# EAGLE board LSU 4.9 OpenAFR Gauge (EAGLE 9.6.2)
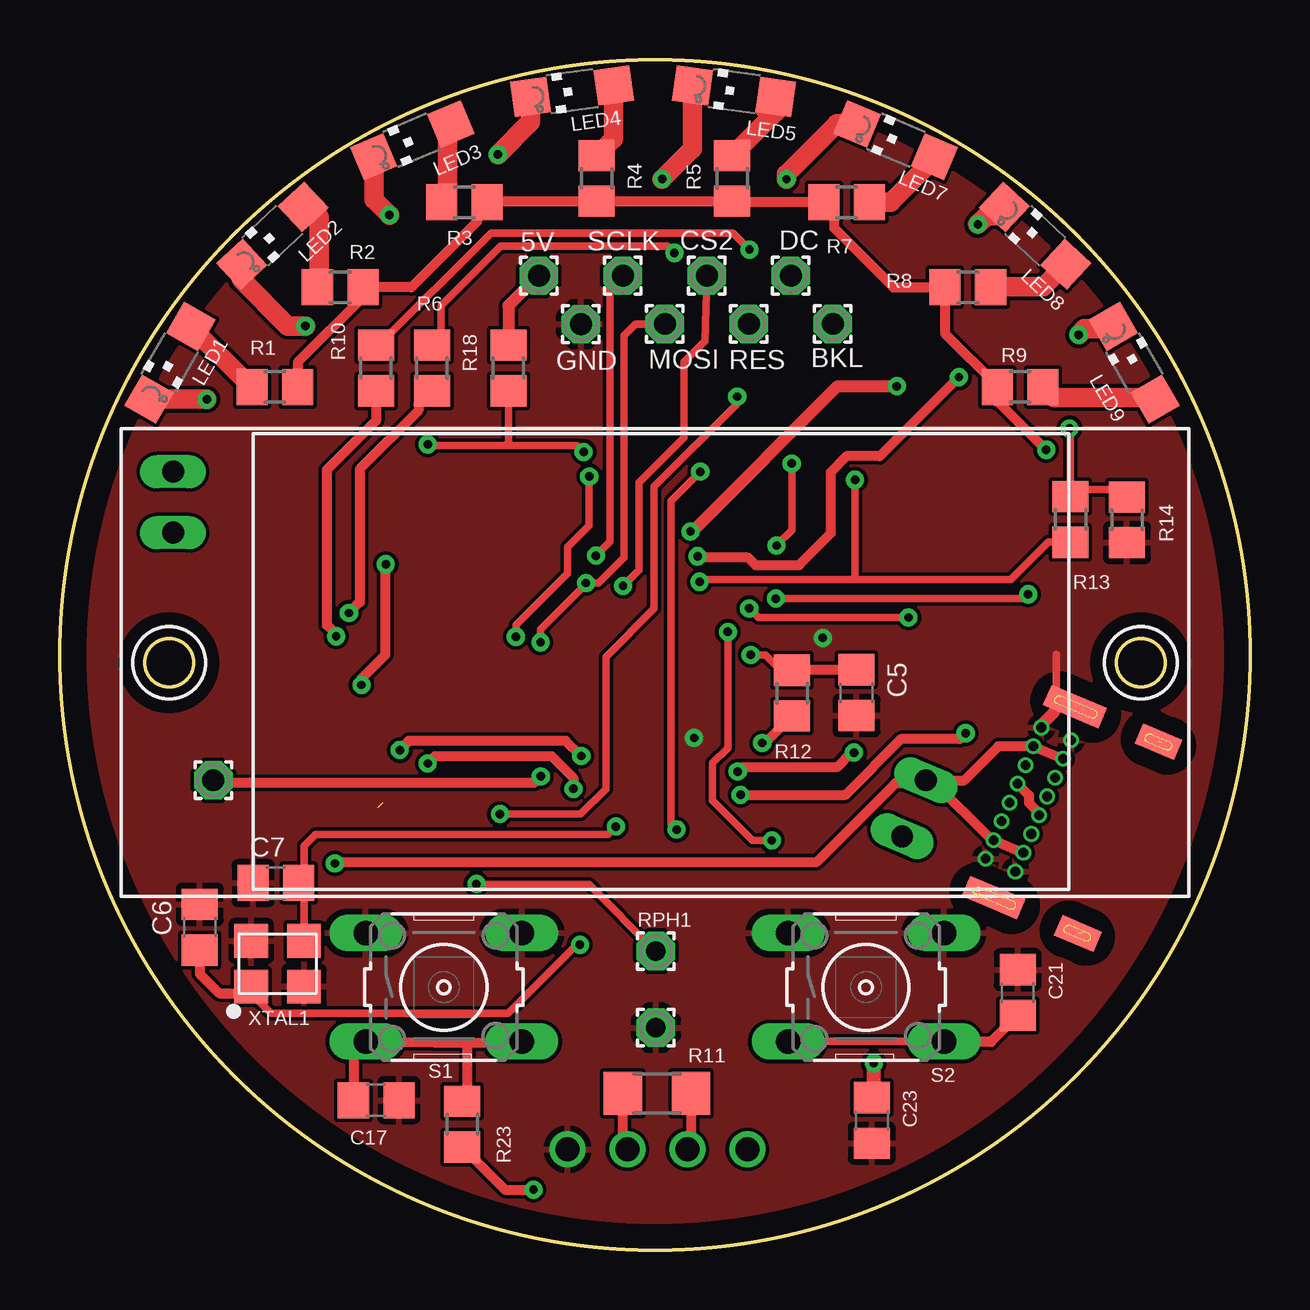
[diagram p0: board, top side]
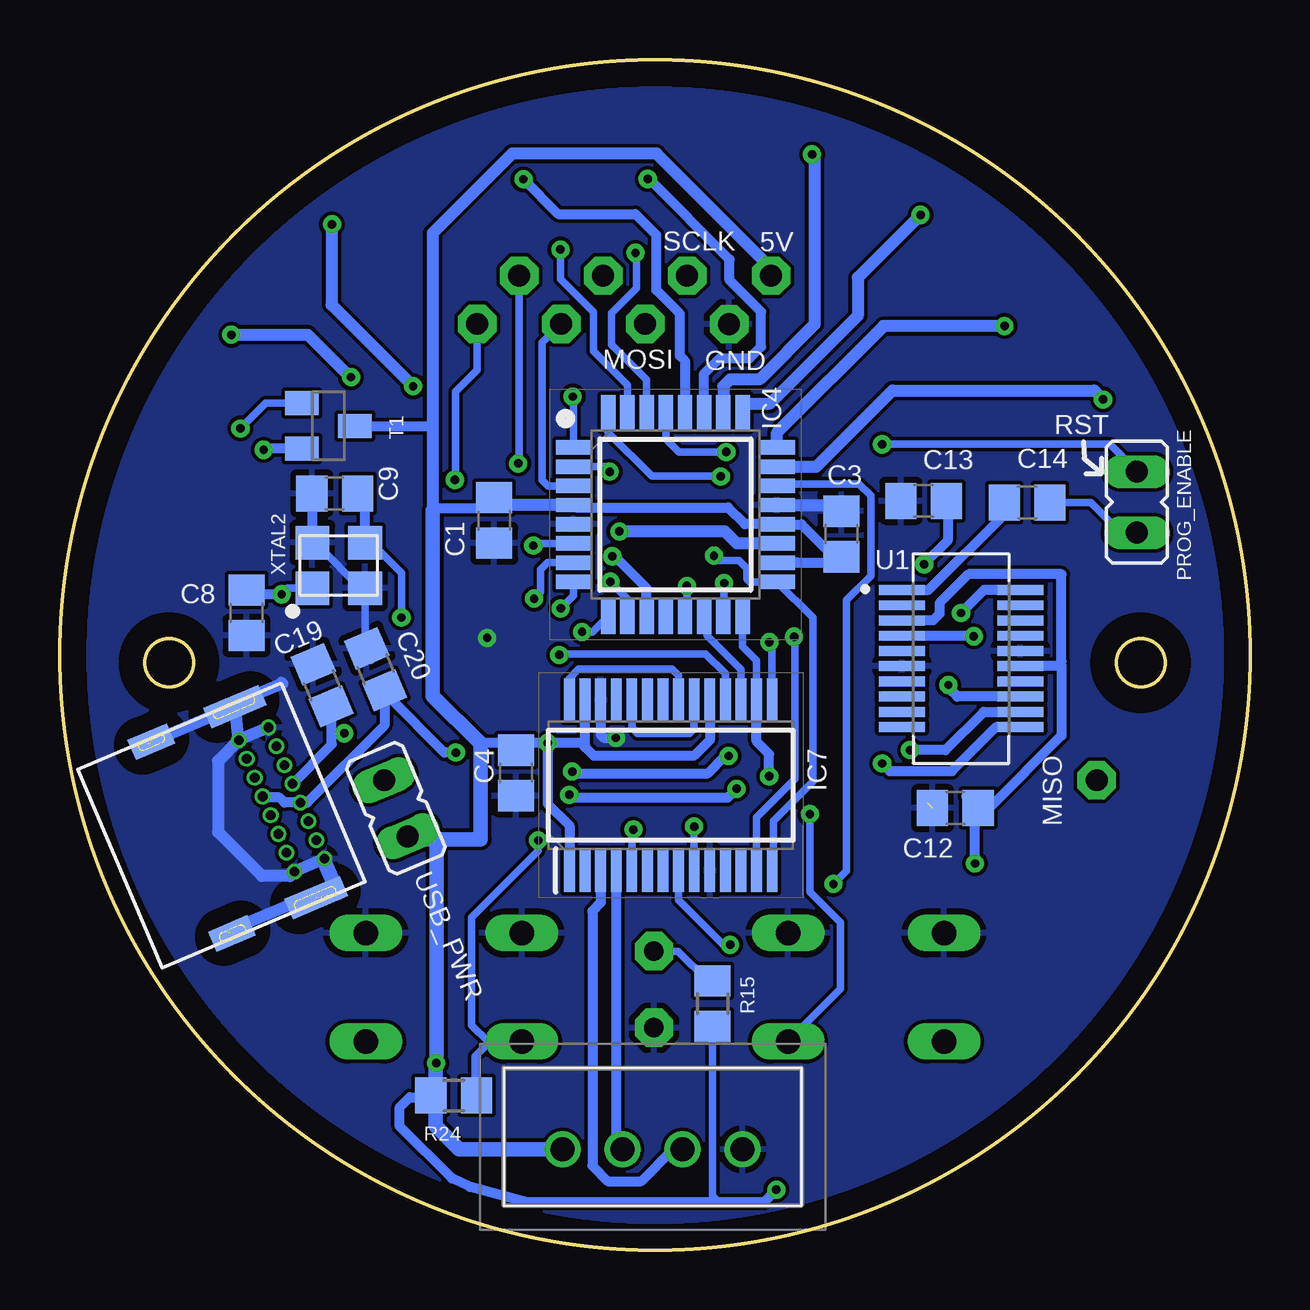
[diagram p1: board, bottom side, seen from below]

Size 49.6 x 49.6 mm. Coordinates in mm from the lower left corner, seen from the top.
Outline: circle at 4.55,24.48 radius 1
Outline: circle at 45.05,24.48 radius 1
Outline: circle at 24.8,24.8 radius 24.8
Copper layers (1*16): Top 0.035mm / dielectric 1.5mm / Bottom 0.035mm
Design rules "default *": minimum track width 6mil, minimum drill 0.35mm, track to track 6mil, track to pad 6mil, pad to pad 6mil, via to via 6mil, smd to smd 6mil, copper to edge 40mil, drill to drill 6mil, minimum pad ring 3mil, minimum via ring 8mil, stop-mask expansion 4mil, vias tented up to drill 0mil, thermal gap 10mil

## Footprints (pad centres in the part's own frame; a part is rotated, then mirrored left to right if it is on the bottom)
1,6/0,9 = drill 0.914 pad 1.6 octagon: 1 0,0
C0805 = smd 1.3 x 1.5: 1 -0.95,0; 2 0.95,0
QFP80P900X900X120-32N = smd 1.475 x 0.6: 1 -4.238,2.8; 2 -4.238,2; 3 -4.238,1.2; 4 -4.238,0.4; 5 -4.238,-0.4; 6 -4.238,-1.2; 7 -4.238,-2; 8 -4.238,-2.8; 17 4.238,-2.8; 18 4.238,-2; 19 4.238,-1.2; 20 4.238,-0.4; 21 4.238,0.4; 22 4.238,1.2; 23 4.238,2; 24 4.238,2.8 | smd 0.6 x 1.475: 9 -2.8,-4.238; 10 -2,-4.238; 11 -1.2,-4.238; 12 -0.4,-4.238; 13 0.4,-4.238; 14 1.2,-4.238; 15 2,-4.238; 16 2.8,-4.238; 25 2.8,4.238; 26 2,4.238; 27 1.2,4.238; 28 0.4,4.238; 29 -0.4,4.238; 30 -1.2,4.238; 31 -2,4.238; 32 -2.8,4.238
SOP65P780X200-28N = smd 1.8 x 0.45: 1 -3.55,4.225; 2 -3.55,3.575; 3 -3.55,2.925; 4 -3.55,2.275; 5 -3.55,1.625; 6 -3.55,0.975; 7 -3.55,0.325; 8 -3.55,-0.325; 9 -3.55,-0.975; 10 -3.55,-1.625; 11 -3.55,-2.275; 12 -3.55,-2.925; 13 -3.55,-3.575; 14 -3.55,-4.225; 15 3.55,-4.225; 16 3.55,-3.575; 17 3.55,-2.925; 18 3.55,-2.275; 19 3.55,-1.625; 20 3.55,-0.975; 21 3.55,-0.325; 22 3.55,0.325; 23 3.55,0.975; 24 3.55,1.625; 25 3.55,2.275; 26 3.55,2.925; 27 3.55,3.575; 28 3.55,4.225
B4BXHALFSN = drill 1 pad 1.5: 1 0,0; 2 2.5,0; 3 5,0; 4 7.5,0
CHIPLED_1206 = smd 1.5 x 1.5: A 0,-1.75; C 0,1.75
1,6/0,8 = drill 0.813 pad 1.6 octagon: 1 0,0
JP1 = drill 0.914 long: 1 0,-1.27; 2 0,1.27
R0805 = smd 1.3 x 1.5: 1 -0.95,0; 2 0.95,0
R1206 = smd 1.6 x 1.803: 1 -1.422,0; 2 1.422,0
B3F-10XX = drill 1.016 long: 1 -3.251,2.261; 2 3.251,2.261; 3 -3.251,-2.261; 4 3.251,-2.261
SOT23-BEC = smd 1 x 1.4: B -0.95,-1.1; C 0,1.1; E 0.95,-1.1
SOP63P599X175-20N = smd 1.97 x 0.41: 1 -2.47,2.857; 2 -2.47,2.223; 3 -2.47,1.587; 4 -2.47,0.953; 5 -2.47,0.318; 6 -2.47,-0.318; 7 -2.47,-0.953; 8 -2.47,-1.587; 9 -2.47,-2.223; 10 -2.47,-2.857; 11 2.47,-2.857; 12 2.47,-2.223; 13 2.47,-1.587; 14 2.47,-0.953; 15 2.47,-0.318; 16 2.47,0.318; 17 2.47,0.953; 18 2.47,1.587; 19 2.47,2.223; 20 2.47,2.857
USBC-2.0-THT = drill 0.4 pad 0.65: P$1 -3,3.7; P$2 -2.15,3.7; P$3 -1.3,3.7; P$4 -0.45,3.7; P$5 0.4,3.7; P$6 1.25,3.7; P$7 2.1,3.7; P$8 2.95,3.7; P$9 2.95,2.35; P$10 2.1,2.35; P$11 1.25,2.35; P$12 0.4,2.35; P$13 -0.45,2.35; P$14 -1.3,2.35; P$15 -2.15,2.35; P$16 -3,2.35 | smd 0.914 x 1.778 bottom: P$17 -4.36,-1.03; P$18 4.31,-1.06 | smd 0.914 x 2.5: P$19 -4.35,2.75; P$22 4.3,2.76 | smd 0.914 x 2.5 bottom: P$20 4.3,2.76; P$21 -4.35,2.75 | smd 0.914 x 1.778: P$23 4.31,-1.06; P$24 -4.36,-1.03
E3X160181X04 = smd 1.4 x 1.4: GND1 -1.1,0.9; GND2 1.1,-1; XTAL1 -1.1,-1; XTAL2 1.1,0.9

## Placement (x,y rotation side)
5V  [1,6/0,9]  19.96,40.61 0 top
BKL  [1,6/0,9]  32.21,38.6 0 top
C1  100nF  [C0805]  31.5,30.41 270 bottom
C3  100nF  [C0805]  17.03,29.84 90 bottom
C4  100nF  [C0805]  30.59,19.88 90 bottom
C5  100nF  [C0805]  33.2,23.23 270 top
C6  100nF  [C0805]  5.83,13.45 90 top
C7  100nF  [C0805]  9,15.29 180 top
C8  100nF  [C0805]  41.82,26.56 270 bottom
C9  100nF  [C0805]  38.15,31.53 180 bottom
C12  100nF  [C0805]  12.28,18.42 180 bottom
C13  100nF  [C0805]  13.6,31.22 180 bottom
C14  100nF  [C0805]  9.29,31.15 0 bottom
C17  100nF  [C0805]  13.18,6.24 180 top
C19  47pF  [C0805]  38.67,23.54 293 bottom
C20  47pF  [C0805]  36.44,24.2 293 bottom
C21  100nF  [C0805]  39.92,10.73 270 top
C23  10uF  [C0805]  33.84,5.4 270 top
CS2  [1,6/0,9]  26.96,40.61 0 top
DC  [1,6/0,9]  30.46,40.61 0 top
GND  [1,6/0,9]  21.71,38.59 0 top
IC4  ATMEGA328PB-AN  [QFP80P900X900X120-32N]  23.95,30.65 0 bottom
IC7  MCP25625-E_SS  [SOP65P780X200-28N]  24.14,19.37 90 bottom
J1  B4B-XH-A_LF__SN_  [B4BXHALFSN]  28.65,4.19 0 bottom
LED1  [CHIPLED_1206]  4.58,36.98 150 top
LED2  [CHIPLED_1206]  8.85,42.28 133 top
LED3  [CHIPLED_1206]  14.68,46.25 113 top
LED4  [CHIPLED_1206]  21.35,48.3 98 top
LED5  [CHIPLED_1206]  28.1,48.3 82 top
LED7  [CHIPLED_1206]  34.84,46.25 67 top
LED8  [CHIPLED_1206]  40.65,42.28 47 top
LED9  [CHIPLED_1206]  44.78,36.98 30 top
MISO  [1,6/0,9]  6.39,19.58 0 top
MOSI  [1,6/0,9]  25.21,38.6 0 top
PAD2  [1,6/0,8]  24.84,9.26 0 top
PROG_ENABLE  [JP1]  4.71,31.17 0 bottom
R1  1k  [R0805]  8.96,35.97 0 top
R2  1k  [R0805]  11.68,40.13 0 top
R3  1k  [R0805]  16.85,43.67 0 top
R4  1k  [R0805]  22.37,44.66 270 top
R5  1k  [R0805]  28.02,44.66 270 top
R6  150  [R0805]  15.5,36.76 270 top
R7  1k  [R0805]  32.79,43.67 180 top
R8  1k  [R0805]  37.84,40.13 180 top
R9  1k  [R0805]  40.02,35.97 180 top
R10  150R  [R0805]  13.17,36.76 270 top
R11  120R  [R1206]  24.88,6.53 180 top
R12  10k  [R0805]  30.52,23.21 270 top
R13  300R  [R0805]  42.12,30.45 270 top
R14  100k  [R0805]  44.47,30.43 90 top
R15  10k  [R0805]  22.4,10.27 90 bottom
R18  10k  [R0805]  18.69,36.76 270 top
R23  10k  [R0805]  16.77,5.24 90 top
R24  10k  [R0805]  33.19,6.44 0 bottom
RES  [1,6/0,9]  28.71,38.6 0 top
RPH1  [1,6/0,8]  24.84,12.45 0 top
S1  [B3F-10XX]  16,10.95 0 top
S2  [B3F-10XX]  33.6,10.95 0 top
SCLK  [1,6/0,9]  23.46,40.61 0 top
T1  [SOT23-BEC]  38.41,34.35 270 bottom
U1  FT231XS-R  [SOP63P599X175-20N]  12.04,24.65 0 bottom
U$1  USBC-2.0-THT  [USBC-2.0-THT]  43.14,17.57 293 bottom
U$2  E3X160181X04  [E3X160181X04]  9.07,11.98 0 top
U$3  E3X160181X04  [E3X160181X04]  37.98,28.58 0 bottom
USB_PWR  [JP1]  35.6,18.41 23 bottom

## Library data of the parts
5V BKL CS2 DC GND MISO MOSI PAD2 RES RPH1 SCLK = wirepad
C1 C3-C9 C12-C14 C17 C19-C21 C23 = rcl; SPICEPREFIX: C
IC4 = ATMEGA328PB-AN; DESCRIPTION: MCU 8-bit ATmega AVR RISC 32KB Flash 2.5V/3.3V/5V 32-Pin TQFP Tray; HEIGHT: 1.2mm; MANUFACTURER_NAME: Microchip; MANUFACTURER_PART_NUMBER: ATMEGA328PB-AN; MOUSER_PART_NUMBER: 556-ATMEGA328PB-AN; MOUSER_PRICE-STOCK: https://www.mouser.co.uk/ProductDetail/Microchip-Technology/ATMEGA328PB-AN?qs=jy4bLUHv09gDoS2J01KCIw%3D%3D
IC7 = MCP25625-E_SS; DESCRIPTION: CAN Controller with Transceiver SSOP28 Microchip MCP25625-E/SS, CAN Controller 1MBps CAN 2.0, 28-Pin SSOP; HEIGHT: 2mm; MANUFACTURER_NAME: Microchip; MANUFACTURER_PART_NUMBER: MCP25625-E/SS; MOUSER_PART_NUMBER: 579-MCP25625-E/SS; MOUSER_PRICE-STOCK: https://www.mouser.co.uk/ProductDetail/Microchip-Technology/MCP25625-E-SS?qs=YlpJWyuQ3PO6FRVW%2Ffac7A%3D%3D
J1 = B4B-XH-A_LF__SN_; DESCRIPTION: CONN HEADER VERT 4POS 2.5MM; HEIGHT: 7mm; MANUFACTURER_NAME: JST (JAPAN SOLDERLESS TERMINALS); MANUFACTURER_PART_NUMBER: B4B-XH-A(LF)(SN); MOUSER_PART_NUMBER: 306-B4BXHALFSN; MOUSER_PRICE-STOCK: https://www.mouser.co.uk/ProductDetail/JST-Commercial/B4B-XH-ALFSN?qs=cdbOS8ANM9CfC08d%252BywhFw%3D%3D
LED1-LED5 LED7-LED9 = led
PROG_ENABLE USB_PWR = jumper
R1-R15 R18 R23 R24 = rcl; SPICEPREFIX: R
S1 S2 = switch-omron; MPN: B3F-1000; OC_FARNELL: 176432; OC_NEWARK: 36M3542
T1 = transistor
U1 = FT231XS-R; CHECK_PRICES: https://www.snapeda.com/parts/FT231XSR/FTDI/view-part/?ref=eda; DESCRIPTION: I/F,USB2.0 FS TO F/L H/S UART,20SSOP; USB IC Type:USB-UART Converter; USB Standard:USB 2.0; Supply Voltage Min:2.97V; Supply Voltage Max:5.5V; Interface Case Style:SSOP; No. of Pins:20Pins; Data Rate:3Mbaud; No. of Ports:4 Port; Operating Temperature Min:-40°C; Operating Temperature Max:85°C; Product Range:FT231X; MSL:MSL 3 - 168 hours; SVHC:No SVHC (15-Jan-2019); Operating Temperature Range:-40°C to +85°C; Supply Voltage Range:2.97V to 5.5V; USB Type:Transceiver; DIGIKEY_PART_NUMBER: 768-1129-1-ND; MF: FTDI Chip; MP: FT231XSR; PACKAGE: None; SNAPEDA_LINK: https://www.snapeda.com/parts/FT231XSR/FTDI/view-part/?ref=snap
U$1 = USBC-2.0-THT
U$2 U$3 = E3X160181X04

## Nets
+5V: 5V.1 C1.1 C3.1 C4.2 C23.1 IC4.4 IC4.18 IC4.20 IC7.1 IC7.19 IC7.27 J1.1 R12.2 R15.1 R18.1 R23.1 R24.1 T1.C USB_PWR.1
BCKLT: BKL.1 IC4.10 R13.2
BINT1: C17.2 IC4.1 R23.2 S1.3 S1.4
BINT2: C21.2 IC4.9 R24.2 S2.3 S2.4
CAN_H: IC7.4 J1.2 R11.1
CAN_INT: IC4.32 IC7.13
CAN_L: IC7.3 J1.3 R11.2
CAN_STBY: IC4.2 IC7.5
D+: C19.2 U1.11 U$1.P$4 U$1.P$12
D-: C20.2 U1.12 U$1.P$5 U$1.P$13
DC: DC.1 IC4.6
GND: C1.2 C3.2 C4.1 C5.2 C6.2 C7.2 C8.2 C9.2 C12.2 C13.2 C17.1 C19.1 C20.1 C21.1 C23.2 GND.1 IC4.5 IC4.21 IC7.10 IC7.26 J1.4 PAD2.1 R14.1 S1.1 S1.2 S2.1 S2.2 U1.6 U1.16 U$1.P$1 U$1.P$8 U$1.P$9 U$1.P$16 U$1.P$17 U$1.P$18 U$1.P$19 U$1.P$20 U$2.GND1 U$2.GND2 U$3.GND1 U$3.GND2
GRN1: IC4.23 LED1.C
GRN2: IC4.24 LED2.C
GRN3: IC4.25 LED3.C
IN_RX: R10.2 U1.4
IN_TX: R6.2 U1.20
N$1: LED1.A R1.1
N$2: IC4.30 R6.1
N$3: LED2.A R2.1
N$4: LED3.A R3.1
N$5: LED4.A R4.1
N$6: LED5.A R5.1
N$7: IC4.31 R10.1
N$8: LED7.A R7.1
N$9: LED8.A R8.1
N$10: LED9.A R9.1
N$11: C7.1 IC7.9 U$2.XTAL2
N$12: C6.1 IC7.8 U$2.XTAL1
N$13: C5.1 IC7.18 R12.1
N$14: C9.1 IC4.8 U$3.XTAL2
N$15: R1.2 R2.2 R3.2 R4.2 R5.2 R7.2 R8.2 R9.2 T1.E
N$16: R13.1 R14.2 T1.B
N$19: C14.2 PROG_ENABLE.1
N$21: C13.1 U1.13
N$22: C14.1 U1.1
N$25: C8.1 IC4.7 U$3.XTAL1
PHOTOSENS: IC4.22 R15.2 RPH1.1
RED1: IC4.28 LED7.C
RED2: IC4.19 LED8.C
RED3: IC4.11 LED9.C
RES: IC4.3 RES.1
RESET: IC4.29 PROG_ENABLE.2 R18.2
RXCAN: IC7.21 IC7.28
SPI_CLK: IC4.17 IC7.14 SCLK.1
SPI_CS1: IC4.14 IC7.17
SPI_CS2: CS2.1 IC4.13
SPI_MISO: IC4.16 IC7.16 MISO.1
SPI_MOSI: IC4.15 IC7.15 MOSI.1
SYS_CLK: IC4.12
TXCAN: IC7.20 IC7.24
VBUS: C12.1 U1.3 U1.15 U$1.P$2 U$1.P$7 U$1.P$10 U$1.P$15 USB_PWR.2
YEL1: IC4.26 LED4.C
YEL2: IC4.27 LED5.C

## Tracks (layer width: path | path; a pad name or v marks a point on that pad's centre or on a via)
+5V  (via drill 0.35)
  Top 0.406: 19.06,38.14 R18.1 18.15,37.71 | R23.1 18.55,2.51 v19.74,2.51 | C23.1 33.84,7.76 33.94,7.86 | R12.2 29.39,21.13 v29.27,21.13
  Top 0.508: 5V.1 19.92,40.59 18.69,39.36 R18.1 18.74,37.66 18.74,37.54 | 33.94,7.86 33.94,7.77 | 33.94,7.77 33.94,6.63 | 33.94,7.77 v33.92,7.79
  Bottom 0.305: 31.19,31.05 C1.1 | IC4.18 19.68,28.68 | R15.1 22.41,2.26 22.14,1.99 | R24.1 34.01,6.44 33.95,6.5 | IC7.27 27.71,22.34 | 27.68,22.38 27.71,22.34 | 27.71,22.34 27.76,22.3 | T1.C 37.29,34.34
  Bottom 0.406: v19.74,2.51 20.26,1.99 22.14,1.99 30.14,1.99 32.52,2.63 33.27,2.98 35.44,5.15 35.44,5.95 35.02,6.37 34.08,6.37 33.95,6.5 | 18.81,28.65 IC4.18 17.27,28.65 C3.1 17.34,28.89 18.69,30.24 19.7,30.24 IC4.20 21.06,30.25 21.75,30.95 28.09,30.95 IC4.4 | IC7.19 22.52,21.25 23.18,20.59 27.35,20.59 27.71,20.96 | 27.71,20.96 IC7.27 | 27.71,20.96 27.89,21.13 v29.27,21.13 | v29.27,21.13 32.1,21.13 | v29.27,21.13 29.27,18.6 28.37,17.7 IC7.1 | v29.27,21.13 30.29,21.13 C4.2 | T1.C 34.13,34.35 34.06,34.42 | C1.1 31.94,30.92 33.96,30.92 34.06,30.82
  Bottom 0.508: IC4.4 31.19,31.05 | C1.1 31.52,31.34 | 5V.1 19.96,40.93 24.73,45.7 30.75,45.7 34.06,42.39 34.06,34.42 34.06,30.82
  Bottom 0.61: 33.91,17.12 v33.91,7.8 v33.92,7.79 33.95,7.76 33.95,6.5 33.95,5.18 32.96,4.19 J1.1 | 34.06,30.82 34.06,23.09 32.1,21.13 32.06,21.09 32.06,17.12 33.91,17.12 | USB_PWR.1 34.98,17.12 33.91,17.12
BCKLT  (via drill 0.35)
  Top 0.305: 33.07,27.94 26.75,27.94 v26.66,27.85 | R13.2 41.19,29.5 39.63,27.94 33.07,27.94 | v33.14,32.1 33.14,28.01 33.07,27.94
  Bottom 0.305: IC4.10 25.95,27.14 v26.66,27.85 | 32.09,38.48 BKL.1 32.21,36.68 33.12,35.77 33.12,32.12 v33.14,32.1
BINT1  (via drill 0.35)
  Top 0.305: v18.34,18.17 21.7,18.17 22.75,19.22 22.75,24.72 24.77,26.74 24.77,31.82 28.23,35.28 v28.23,35.57
  Top 0.406: 16.98,8.64 S1.3 12.23,8.12 C17.2 | 16.98,8.64 S1.4 | R23.2 16.98,6.4 16.98,8.64
  Bottom 0.305: v18.34,18.17 18.34,14.93 17.06,13.65 17.06,10.88 S1.4 | v28.23,35.57 28.19,35.53 IC4.1
BINT2  (via drill 0.35)
  Top 0.305: S2.3 S2.4 | v29.67,17.07 28.86,17.07 27.2,18.73 27.2,20.29 27.84,20.93 v27.84,25.76
  Top 0.406: S2.4 36.88,8.67 38.81,8.67 C21.2
  Bottom 0.305: IC4.9 27.4,25.76 v27.84,25.76 | v29.67,17.07 29.67,16.63 32.44,13.86 32.44,9.37 31.76,8.69 S2.3 30.5,8.69 30.64,8.83 31.54,8.83 32.3,8.07 32.3,7.03 32.39,6.94 32.39,6.59 R24.2
CAN_H
  Top 0.406: R11.1 26.3,4.34 J1.2
  Bottom 0.406: IC7.4 26.42,4.41 J1.2
CAN_INT  (via drill 0.35)
  Top 0.305: v19,25.56 19,26.04 21.16,28.2 21.16,29.29 22.06,30.19 v22.06,32.24
  Bottom 0.305: IC4.32 26.75,34.07 24.93,32.25 v22.07,32.25 v22.06,32.24 | v19,25.56 18.96,25.52 18.96,19.63 20.57,18.03 IC7.13
CAN_L
  Top 0.406: R11.2 23.46,4.4 J1.3
  Bottom 0.406: IC7.3 27.07,14.46 27.41,14.12 27.41,3.51 26.77,2.87 25.37,2.87 24.05,4.19 J1.3
CAN_STBY  (via drill 0.35)
  Top 0.305: v26.69,32.44 25.46,31.21 25.46,17.76 v25.7,17.52
  Bottom 0.305: IC4.2 26.9,32.65 v26.69,32.44 | v25.7,17.52 25.75,17.47 25.75,15.84 IC7.5
D+  (via drill 0.35)
  Top 0.406: U$1.P$4 40.39,18.95 40.39,18.63 40.82,18.19 U$1.P$12 | v21.4,19.22 21.4,19.67 20.49,20.58 15.63,20.58 v15.33,20.28 | v28.37,18.97 32.74,18.97 35.06,21.29 37.5,21.29 v37.75,21.54
  Bottom 0.305: v37.75,21.54 38.27,21.54 38.27,22.37
  Bottom 0.406: C19.2 38.3,22.4 38.27,22.37 38.27,21.07 U$1.P$4 | v21.4,19.22 21.76,18.86 28.26,18.86 v28.37,18.97 | U1.11 10.58,21.79 12.41,19.96 15.01,19.96 v15.33,20.28
D-  (via drill 0.35)
  Top 0.406: v28.25,19.94 28.43,20.12 32.38,20.12 32.99,20.73 v33.1,20.73 | v21.73,20.59 21.71,20.59 21.08,21.22 14.55,21.22 v14.16,20.83
  Bottom 0.406: U$1.P$13 41.11,18.86 40.45,18.86 40.24,18.65 U$1.P$5 39.29,18.65 36.07,21.87 C20.2 36.07,23.17 36.15,23.08 35.93,23.08 33.58,20.73 v33.1,20.73 | v28.25,19.94 28.18,19.87 22.6,19.87 21.88,20.59 v21.73,20.59 | U1.12 11.09,22.43 12.69,20.83 v14.16,20.83
DC  (via drill 0.35)
  Top 0.305: v29.87,29.36 29.87,29.38 30.5,30.01 v30.5,32.78
  Bottom 0.305: v29.87,29.36 29.78,29.45 IC4.6 | v30.5,32.78 30.46,32.82 DC.1
GND  (via drill 0.35)  (4 unrouted)
  Top 0.305: 41.54,24.82 41.54,23.18 | 10.52,10.98 U$2.GND2 9.87,10.98
  Top 0.406: 14.23,6.14 C17.1 | 41.45,23.17 41.45,23.18 41.54,23.18 | 41.45,23.06 41.45,22.43 | U$1.P$1 40.91,21.89 | 33.73,4.56 C23.2 33.95,4.56 | 8.05,12.96 U$2.GND1
  Top 0.508: 18.06,13.14 19.14,13.14 | GND.1 | 41.45,22.43 40.91,21.89
  Top 0.61: S2.2 36.89,13.17
  Bottom 0.305: 14.8,30.98 C13.2 | C12.2 13.23,18.35 | U$3.GND2 36.88,27.45 | 36.88,27.45 36.88,24.81 36.63,24.56 36.63,24.89 C20.1 | U$3.GND1 38.97,29.48 36.94,27.45 36.88,27.45
  Bottom 0.406: 40.4,23.68 40.33,23.61 | IC4.21 19.87,31.05 19.81,31.11 | 31.5,29.62 C1.2 | C9.2 39.1,29.61 38.97,29.48 | 40.33,23.66 40.31,23.64 | IC7.26 27.07,21.46 26.94,21.34 v26.43,21.34
  Bottom 0.508: U$1.P$1 U$1.P$16 | U$1.P$16 U$1.P$19 45.35,21.37 45.93,21.12 | C20.1 37.15,25.07 | 41.47,23.16 40.33,23.61 | C19.1 39.22,24.24 | 42.7,13.25 38.81,14.87 38.1,15.17 U$1.P$8 U$1.P$9 40.01,15.58 41.17,15.58 43.01,17.42 43.01,20.39 U$1.P$16 | 19.72,31.06 IC4.21 | 28.21,30.27 IC4.5 28.15,30.21 | IC4.21 | IC4.21 | IC4.21 17.29,31.05 C3.2
  Bottom 0.61: U$1.P$8 38.58,16.2 38,14.89 | 36.85,13.3 S2.2 | 13.45,18.62 13.35,18.73
  other vias: 31.8,25.51
  pour Top: 14.45,49.57 -0.01,35.11 -0.01,14.59 14.55,0.03 35.04,0.03 49.71,14.7 49.71,35.07 35.21,49.57
  pour Bottom: 14.46,49.57 0,35.11 0,14.59 14.56,0.03 35.05,0.03 49.73,14.71 49.73,35.06 35.22,49.57
GRN1  (via drill 0.35)
  Top 0.813: v6.12,35.45 6.11,35.46 LED1.C
  Bottom 0.508: IC4.23 18.07,32.65 14.9,35.83 6.5,35.83 v6.12,35.45
GRN2  (via drill 0.35)
  Top 0.813: v10.23,38.51 9.5,38.51 7.57,40.44 LED2.C
  Bottom 0.508: IC4.24 19.71,34.08 15.28,38.51 v10.23,38.51
GRN3  (via drill 0.35)
  Top 0.813: LED3.C 13.1,45.58 13.1,43.77 v13.73,43.14
  Bottom 0.305: IC4.25 21.15,35.28
  Bottom 0.508: v13.73,43.14 16.34,40.53 16.34,38.94 20,35.28 21.15,35.28
IN_RX  (via drill 0.35)
  Top 0.406: R10.2 13.17,34.57 11.13,32.53 11.13,26.05 11.51,25.66 v11.51,25.58
  Bottom 0.406: U1.4 11.53,25.6 v11.51,25.58
IN_TX  (via drill 0.35)
  Top 0.305: R6.2 15.43,35.81
  Top 0.406: R6.2 14.94,35.25 14.94,34.99 12.49,32.54 12.49,27 v12.04,26.55
  Bottom 0.406: v12.04,26.55 11.08,27.51 U1.20
N$1
  Top 0.813: LED1.A 7.99,35.97 R1.1
N$2  (via drill 0.35)
  Top 0.305: R6.1 15.89,38.13 15.89,39.37 18.37,41.85 25.32,41.85 v25.61,41.56
  Bottom 0.305: IC4.30 25.15,36.27 26.62,37.74 26.62,39.04 25.57,40.09 25.57,41.52 v25.61,41.56
N$3
  Top 0.813: LED2.A 10.37,43.47 10.8,43.04 10.8,40.43 10.48,40.13 R2.1
N$4
  Top 0.813: LED3.A 16.15,46.79 16.15,43.92 R3.1
N$5
  Top 0.305: 23.08,46.32 23.08,48.3 23.1,48.32
  Top 0.6: LED4.A 22.73,48.19
  Top 0.813: LED4.A 23.08,46.32 R4.1
N$6
  Top 0.305: R5.1 29.78,47.37 29.78,47.87
  Top 0.6: 29.28,47.51 LED5.A
  Top 0.813: LED5.A 29.83,47.42 R5.1
N$7  (via drill 0.35)
  Top 0.305: R10.1 13.29,37.71 17.97,42.39 28.05,42.39 v28.74,41.7
  Bottom 0.305: IC4.31 25.95,36.05 27.37,37.47 27.37,39.1 28.74,40.47 v28.74,41.7 28.86,41.58
N$8
  Top 0.813: LED7.A 36.45,45.48 34.64,43.67 R7.1
N$9
  Top 0.813: LED8.A 40.99,40.15 38.81,40.15 R8.1
N$10
  Top 0.305: 40.99,35.97 R9.1 41.43,35.51 45.62,35.51 LED9.A
  Top 0.813: LED9.A 45.59,35.53 41.43,35.53 40.99,35.97
N$11  (via drill 0.35)
  Top 0.305: 10.17,13.03 U$2.XTAL2 10.17,14.79 10.17,16.84 10.65,17.32 22.84,17.32 v23.17,17.65
  Top 0.406: C7.1 9.95,15.01 10.17,14.79
  Bottom 0.305: v23.17,17.65 23.17,17.14 IC7.9
N$12  (via drill 0.35)
  Top 0.305: U$2.XTAL1 7.97,10.7 8.81,9.86 18.67,9.86 21.53,12.72 v21.67,12.72
  Top 0.406: C6.1 5.83,11.51 6.64,10.7 7.97,10.7
  Bottom 0.305: IC7.8 23.82,14.59 21.95,12.72 v21.67,12.72
  Bottom 0.406: IC7.8 23.8,15.81
N$13  (via drill 0.35)
  Top 0.305: R12.1 30.05,24.16 29.41,24.8 v28.79,24.8
  Top 0.406: C5.1 30.98,24.18 30.52,24.34 R12.1
  Bottom 0.305: IC7.18 21.87,24.03 22.69,24.85 28.74,24.85 v28.79,24.8
N$14  (via drill 0.35)
  Top 0.305: v28.73,26.74 29.11,26.36 v35.37,26.36
  Bottom 0.305: IC4.8 28.19,27.28 v28.73,26.74 | v35.37,26.36 35.37,28.21 36.64,29.48 U$3.XTAL2
  Bottom 0.406: U$3.XTAL2 36.88,31.21 C9.1
N$15  (via drill 0.35)
  Top 0.406: R1.2 9.91,37 12.63,39.72 R2.2 14.65,40.13 17.38,42.85 17.38,43.25 R3.2 17.84,43.71 R4.2 R5.2 28.06,43.67 R7.2 31.84,43.56 32.26,43.14 32.26,42.6 34.74,40.13 R8.2 36.89,38.2 39.07,36.02 R9.2 | v41.11,33.35 39.07,35.39
  Top 0.508: 39.07,35.39 R9.2
  Bottom 0.406: v41.11,33.35 41.06,33.4 T1.E
N$16  (via drill 0.35)
  Top 0.305: v42.08,34.24 42.12,34.2 R13.1 42.42,31.7 44.15,31.7 R14.2
  Bottom 0.305: T1.B 41.02,35.3 v42.08,34.24
N$19
  Bottom 0.305: PROG_ENABLE.1 4.81,29.9 5.1,29.62 6.63,31.15 C14.2
N$21  (via drill 0.35)
  Top 0.406: v12.57,23.55 12.57,23.81 13.56,24.8 13.56,28.56 v13.58,28.58
  Bottom 0.406: U1.13 12.2,23.06 12.57,23.43 v12.57,23.55 | C13.1 12.6,31.17 12.6,29.56 v13.58,28.58
N$22
  Bottom 0.305: 9.77,30.68 C14.1 10.24,30.66
  Bottom 0.406: 10.24,30.66 13.39,27.51 U1.1
N$25  (via drill 0.35)
  Top 0.305: v29.84,27.15 v29.84,27.14 40.17,27.14 v40.36,27.33
  Bottom 0.305: v29.84,27.15 29.57,27.42 29.57,28.36 29.28,28.65 IC4.7 | v40.36,27.33 40.11,27.58 U$3.XTAL1
  Bottom 0.406: C8.1 41.64,27.33 v40.36,27.33
PHOTOSENS  (via drill 0.35)
  Top 0.305: v17.36,15.25 17.38,15.23 22.05,15.23 24.82,12.45 RPH1.1
  Bottom 0.305: v17.36,15.25 16.82,15.79 16.82,27.08 15.8,28.1 15.8,31.44 16.29,31.93 19.63,31.93 IC4.22 | R15.2 22.6,11.22 23.83,12.45 RPH1.1
RED1  (via drill 0.35)
  Top 0.813: LED7.C 32.38,46.93 30.28,44.83 v30.28,44.63
  Bottom 0.406: v30.28,44.63 28.83,43.18 25.62,43.18 24.74,42.3 24.74,40 23.76,39.02 23.76,37.27 23.55,37.06 IC4.28
RED2  (via drill 0.35)
  Top 0.508: v26.28,29.95 26.36,29.95 32.41,36 v34.88,36
  Top 0.813: LED8.C 39.02,43.12 38.63,43.12 v38.26,42.75
  Bottom 0.508: v34.88,36 38.28,39.4 38.28,42.73 v38.26,42.75 | IC4.19 21.39,29.45 21.89,29.95 v26.28,29.95
RED3  (via drill 0.35)
  Top 0.305: v26.58,28.91 26.63,28.86 | v42.46,38.15 42.76,38.15 43.19,38.58 43.88,38.58
  Top 0.406: 26.63,28.86 28.68,28.86 29,28.55 30.8,28.55 32.12,29.86 32.12,32.41 32.79,33.08 34.17,33.08 v37.47,36.38
  Top 0.813: LED9.C 43.8,38.4 42.71,38.4 v42.46,38.15
  Bottom 0.406: IC4.11 25.17,26.43 25.17,27.61 26.47,28.91 v26.58,28.91
  Bottom 0.508: v37.47,36.38 37.48,36.36 39.27,38.15 v42.46,38.15
RES
  Bottom 0.305: RES.1 29.5,37.81 29.5,32.09 29.26,31.85 IC4.3
RESET  (via drill 0.35)
  Top 0.305: 18.82,35.87 R18.2 18.69,33.65 18.57,33.53 | 18.57,33.53 15.38,33.53 v15.33,33.58 | 18.57,33.53 21.56,33.53 v21.83,33.26
  Bottom 0.305: IC4.29 24.34,34.87 24.34,33.8 23.79,33.26 v21.83,33.26 | PROG_ENABLE.2 5.85,33.58 v15.33,33.58
RXCAN
  Bottom 0.305: IC7.21 | IC7.28 28.37,23.45 28.39,23.45 28.39,23.8 27.98,24.21 24.09,24.21 23.82,23.93 IC7.21
SPI_CLK  (via drill 0.35)
  Top 0.305: 22.42,29.02 v22.34,28.94 22.92,29.52 22.92,40.07 SCLK.1 23.38,40.53
  Bottom 0.305: IC7.14 19.86,15.88 19.86,17.89 18.22,19.53 18.22,26.36 IC4.17 20.85,27.85 20.96,27.96 20.96,28.4 21.3,28.74 22.14,28.74 v22.34,28.94 | SCLK.1 23.03,40.18
SPI_CS1
  Bottom 0.305: IC4.14 22.64,26.3 22.64,25.61 21.21,24.18 IC7.17
SPI_CS2  (via drill 0.35)
  Top 0.305: v23.47,27.68 24.14,28.35 24.14,31.99 26.01,33.86 26.01,37 26.89,37.88 CS2.1
  Bottom 0.305: v23.47,27.68 23.47,26.49 IC4.13
SPI_MISO  (via drill 0.35)
  Top 0.406: MISO.1 6.39,19.47 19.77,19.47 v20.04,19.74
  Bottom 0.305: IC4.16 21.15,25.15 20.57,24.57 IC7.16
  Bottom 0.406: v20.04,19.74 20.04,20.67 20.57,21.2 IC7.16
SPI_MOSI  (via drill 0.35)
  Top 0.305: v20.03,25.33 20.03,25.86 21.92,27.75 v21.92,27.8 22.44,27.8 23.51,28.87 23.51,38.11 23.98,38.58 24.4,38.58 | 24.4,38.58 24.41,38.57 | MOSI.1 25,38.58 24.4,38.58
  Bottom 0.305: IC7.15 19.92,25.21 v20.03,25.33 | v21.92,27.8 21.92,26.44 IC4.15
TXCAN
  Bottom 0.305: IC7.20 23.17,21.73 23.36,21.53 25.52,21.53 25.77,21.78 IC7.24
VBUS  (via drill 0.35)
  Top 0.406: U$1.P$10 U$1.P$7 38.84,17.08 36.35,19.58 USB_PWR.2 | U$1.P$15 U$1.P$2 39.11,20.99 37.7,19.58 USB_PWR.2 | v11.46,16.11 11.51,16.16 31.53,16.16 34.82,19.45 35.97,19.45 USB_PWR.2
  Bottom 0.406: C12.1 11.82,18.91 | C12.1 11.48,18.27 11.48,16.11 v11.46,16.11 | U1.15 9.55,24.35 7.85,24.35 | 7.85,24.35 7.85,21.44 10.87,18.42 C12.1 | 7.85,24.35 7.85,24.53 7.85,28.17 11.73,28.17 12.94,26.96 12.94,26.51 13.21,26.24 U1.3
YEL1  (via drill 0.35)
  Top 0.6: 19.45,47.89 LED4.C
  Top 0.813: LED4.C 19.62,47.03 v18.25,45.66
  Bottom 0.508: IC4.26 21.95,36 21.67,36.28 20.45,36.28 18.15,38.58 18.15,45.56 v18.25,45.66
YEL2  (via drill 0.35)
  Top 0.305: v25.1,44.64 25.1,44.71
  Top 0.813: LED5.C 26.37,45.91 v25.1,44.64
  Bottom 0.305: 25.08,44.67 v25.1,44.64
  Bottom 0.406: IC4.27 22.77,34.91 22.77,36.5 22.1,37.17 20.86,37.17 20.38,37.65 20.38,39.11 21.69,40.42 21.69,41.28 25.08,44.67

## Text on the board
bPlace: 5V | SCLK | GND | MOSI
tNames: XTAL1
bNames: RST | XTAL2